# Altium PCB FTM_PCB.PcbDoc
Units mm, origin at the board's own origin, x right, y up, seen from the top; angles counter-clockwise.
Board outline 87.5 x 72.64 mm, 2 copper layers (Top Layer, Bottom Layer); 17 components, 20 nets, 84 pads, 10 vias.
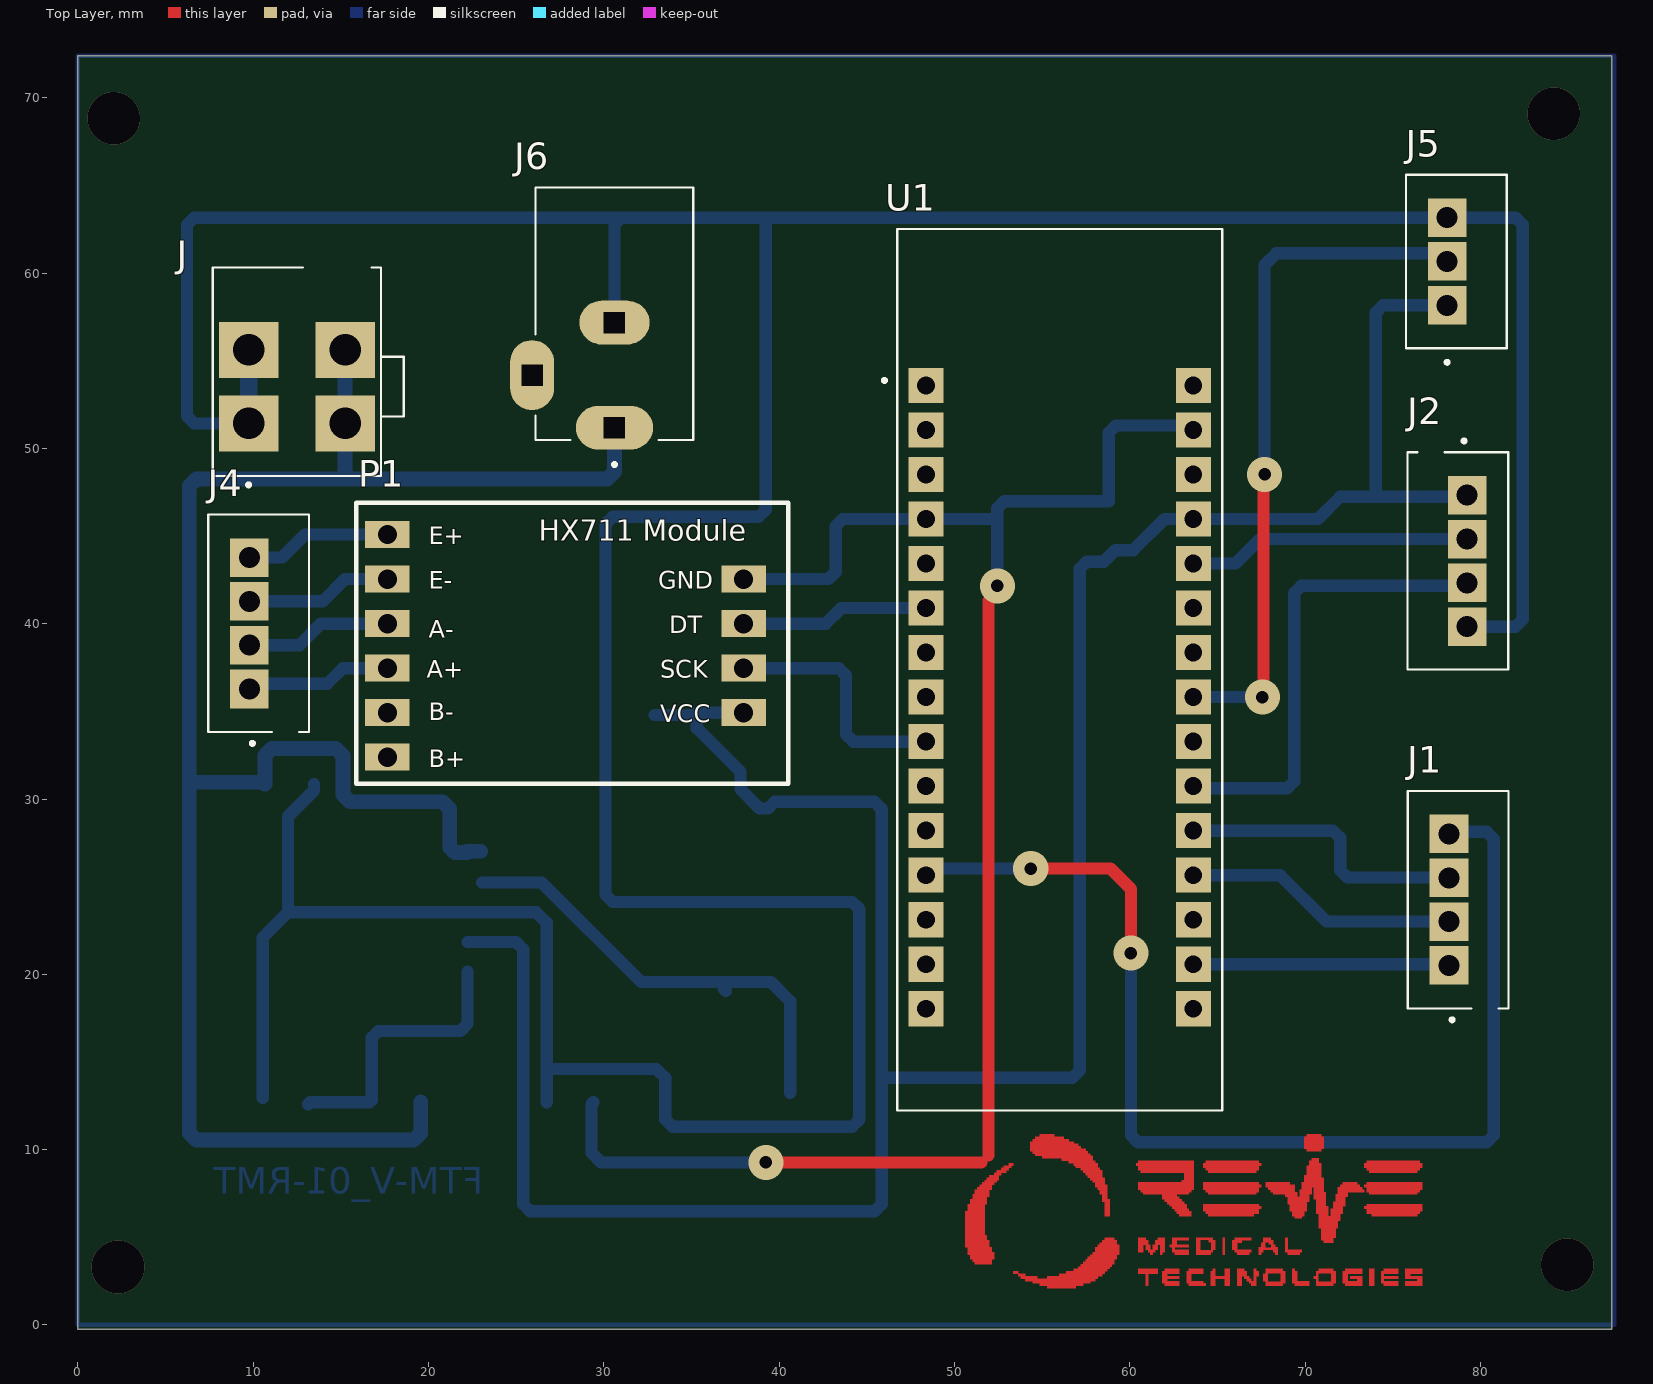
[diagram p0: Top Layer view]
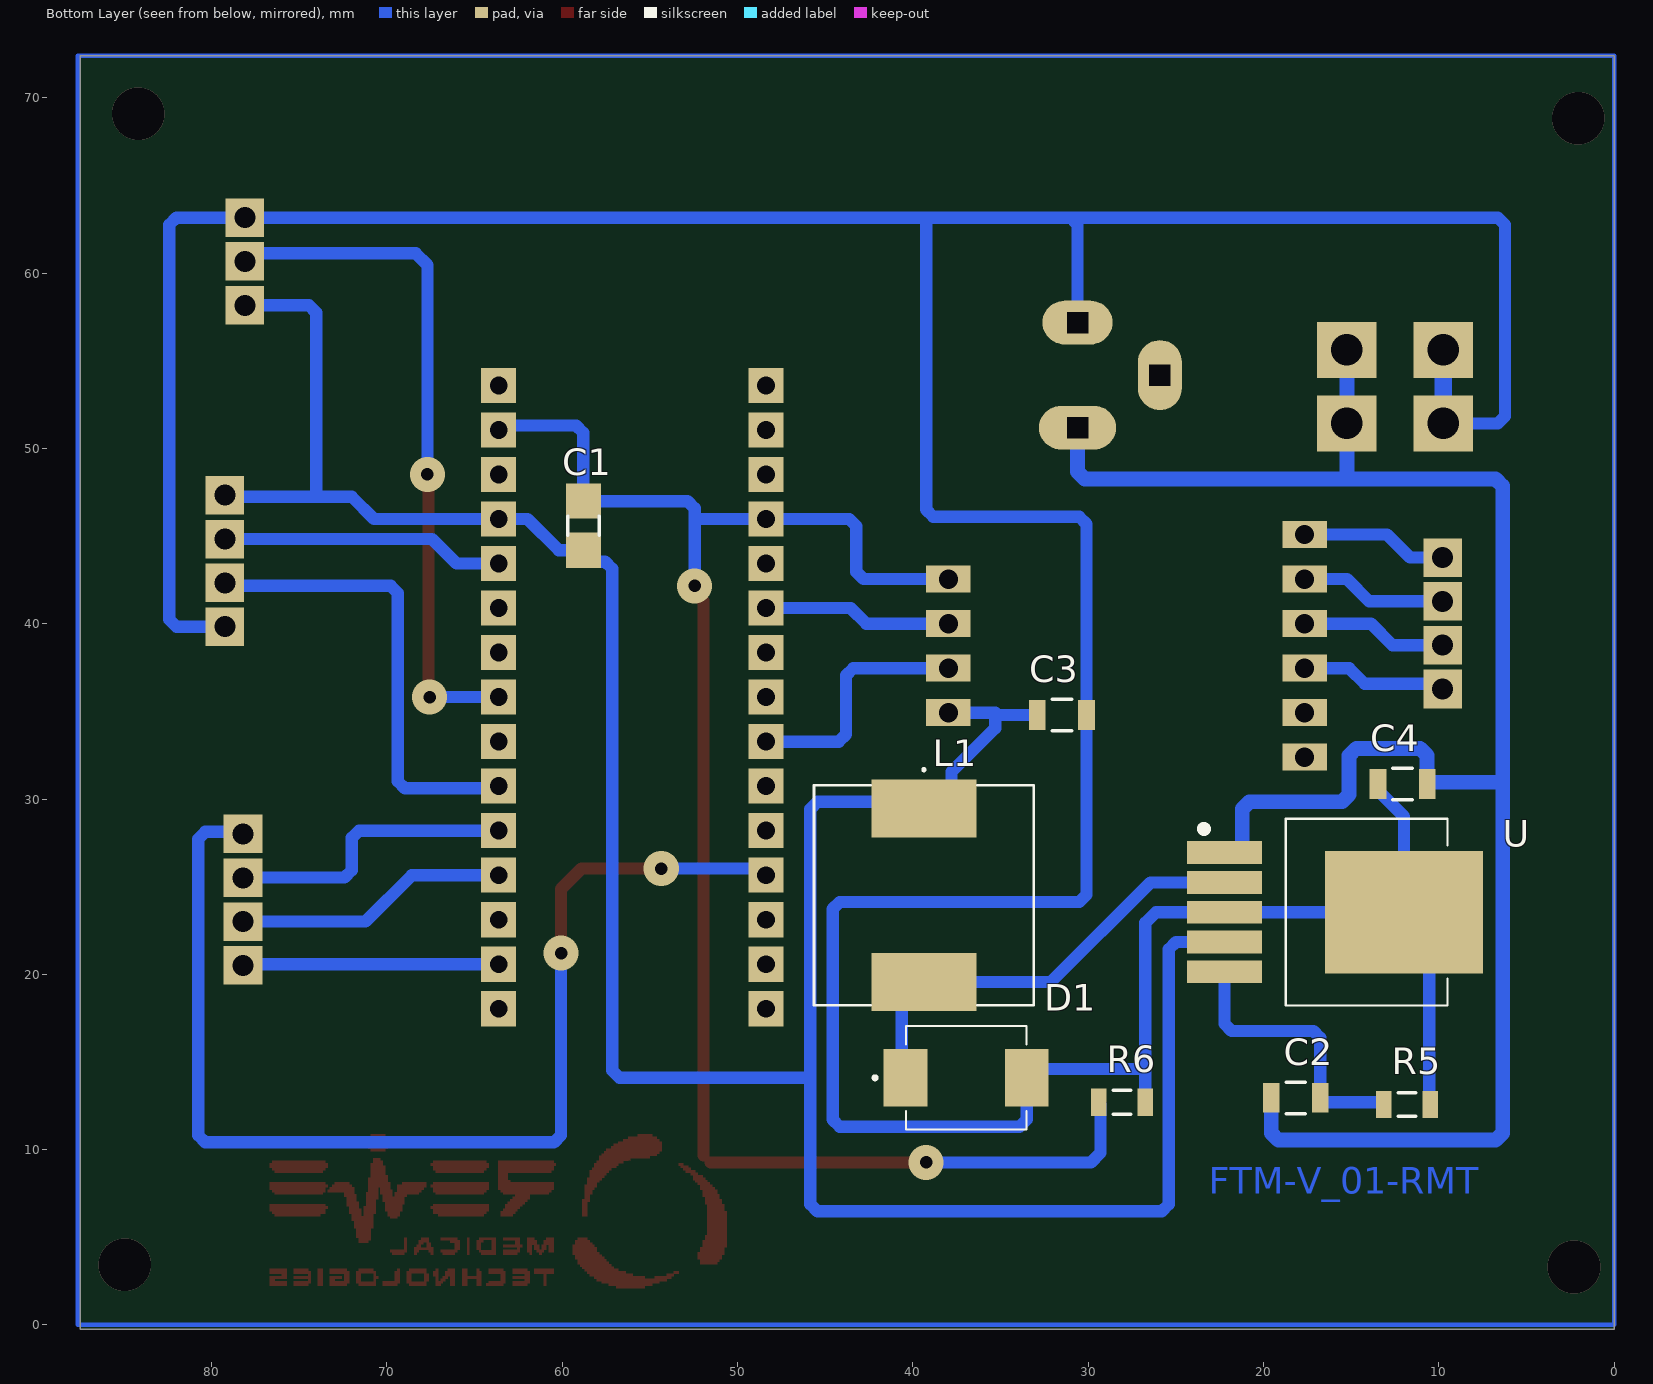
[diagram p1: Bottom Layer view, seen from below]
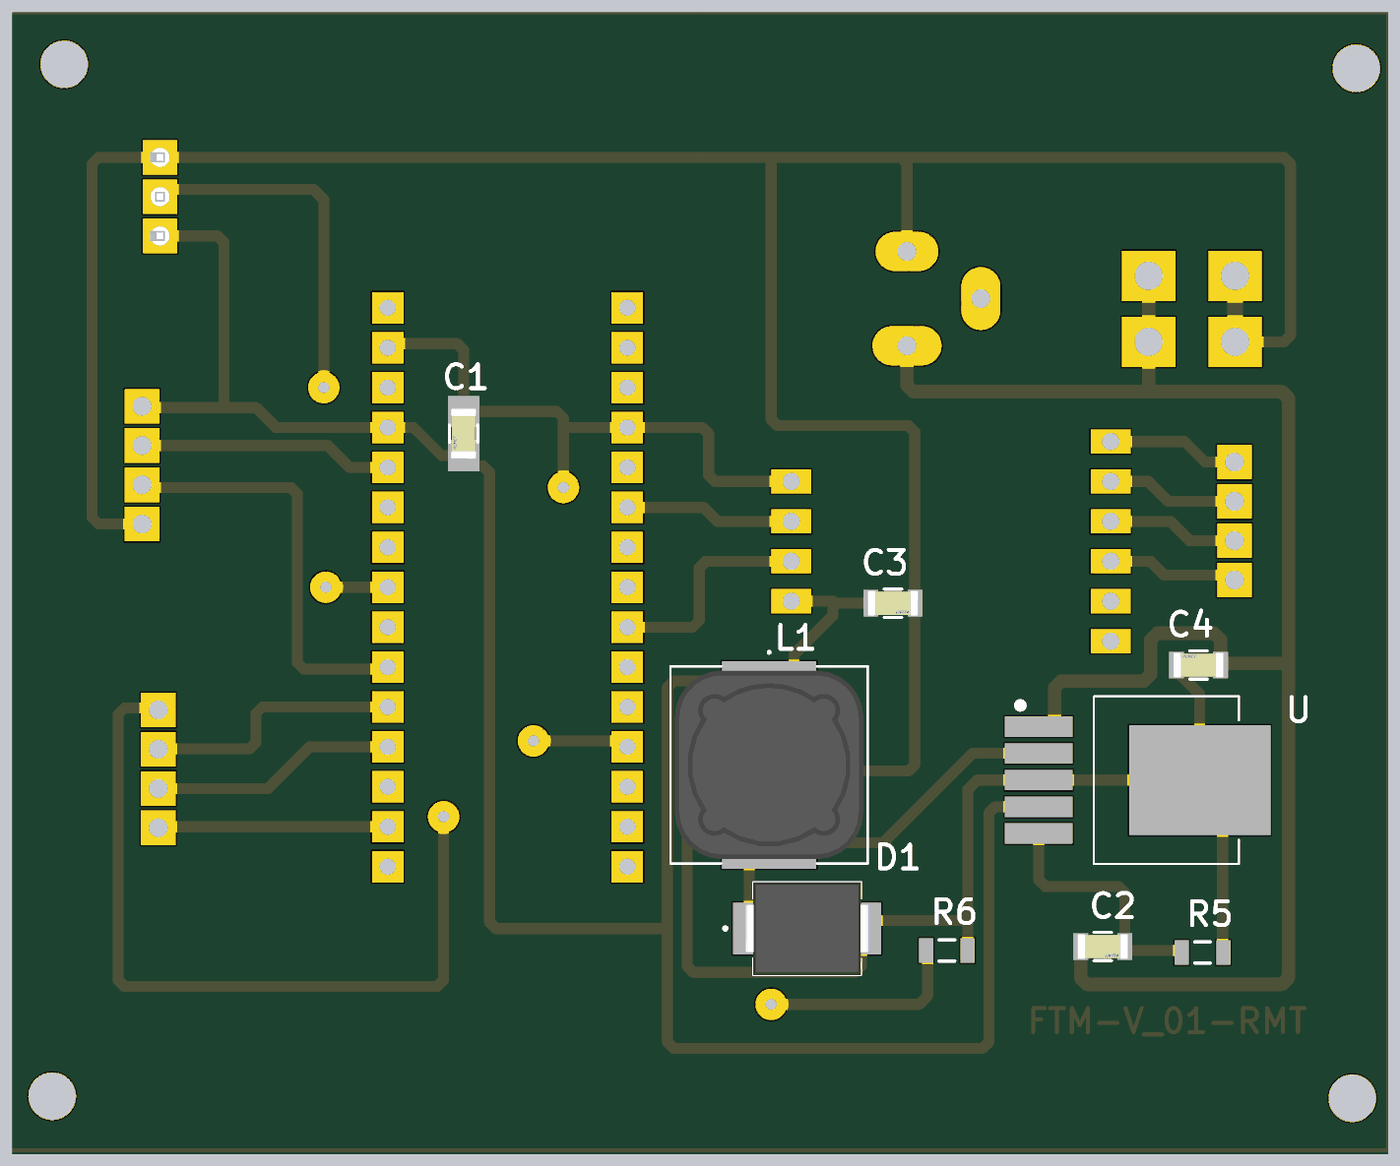
[diagram p2: 3D render of the assembled board from below, using the file's embedded part models]

## Layer stack, top to bottom
Top Solder: solder mask 0.0102, Solder Resist, Dk 3.5
Top Layer: signal copper 0.0356
Dielectric 1: dielectric 0.32, FR-4, Dk 4.8
Bottom Layer: signal copper 0.0356
Bottom Solder: solder mask 0.0102, Solder Resist, Dk 3.5

## Board outline
0,-0.254 0,72.39 87.503,72.39 87.503,-0.254

## Design rules (kind name [scope] priority, off if disabled: settings)
Clearance [All] p1: gap=0.254 ignorepadtopadclearanceinfootprint=FALSE except(0: Arc-Hole Track-Hole SMDPad-Hole THPad-Hole Via-Hole Fill-Hole Poly-Hole Region-Hole Text-Hole)
HoleSize [All] p1: absolutevalues=TRUE maxlimit=5.08 minlimit=0.025 maxpercent=80.000 minpercent=20.000
PolygonConnect [All] p1: connectstyle=Relief reliefconductorwidth=0.254 reliefentries=4 polygonreliefangle="90 Angle" airgapwidth=0.254
RoutingVias [All] p1: holewidth=1 width=1.27 viastyle="Through Hole" minholewidth=0.711 minwidth=1.27 maxholewidth=1 maxwidth=1.27
SolderMaskExpansion [All] p1: expansion=0.102 istentingtop=FALSE
Width [All] p1: maxlimit=1 minlimit=0.7 preferedwidth=1
29 further rules are at their usual default settings.

## Components (designator, comment, footprint, x,y, rotation, side; value= is the part's Value field where it differs from the comment)
C1 "C1206C101J1GACTU" FP-C1206C-EB-MFG#1 58.801,45.593 r90 bottom value="100 pF"
C2 "C1206C101J1GACTU" FP-C1206C-EB-MFG#2 18.158,12.954 r0 bottom value="100 pF"
C3 "C1206C101J1GACTU" FP-C1206C-EB-MFG#2 31.496,34.798 r0 bottom value="100 pF"
C4 "C1206C101J1GACTU" FP-C1206C-EB-MFG#2 12.065,30.861 r180 bottom value="100 pF"
D1 "SS34" DIOM7959X265N 36.957,14.097 r180 bottom
J "3-1775099-0" TE_3-1775099-0 12.49,53.526 r90 top
J1 "B4B-XH-AM_(LF)(SN)" JST_B4B-XH-AM_(LF)(SN) 78.74,24.257 r270 top
J2 "B4B-XH-AM_(LF)(SN)" JST_B4B-XH-AM_(LF)(SN) 78.723,43.581 r90 top
J4 "B4B-XH-AM_(LF)(SN)" JST_B4B-XH-AM_(LF)(SN) 10.304,40.025 r270 top
J5 "B3B-XH-A_(LF)(SN)" "JST_B3B-XH-A (LF)(SN)" 78.63,60.666 r270 top
J6 "DC-005-5A-2.0" XKB_DC-005-5A-2.0 30.607,57.181 r270 top
L1 "CDRH127/LDNP-470MC" IND_CDRH127/LDNP-470MC_SUM 39.37,24.511 r270 bottom value=100UH
P1 "Component_1" PCBComponent_1 9.779,46.736 r0 top
R5 "ERJ-8ENF1001V" RESC3216X70X50LL05T20 11.811,12.573 r0 bottom value=1kOhms
R6 "ERJ-8ENF1001V" RESC3216X70X50LL05T20 28.067,12.7 r180 bottom value=1kOhms
U "LM2576-5.0WU" DPAK6P170_1524X459L254X81N 15.895,23.544 r270 bottom
U1 "NUCLEO-L432KC" MODULE_NUCLEO-L432KC 56.007,37.379 r0 top

## Footprints (in the part's own frame and the unit in brackets; to place one, negate y for a bottom-side part, rotate by r counter-clockwise, add the part's x,y. Pads: shape width x height; smd on the part's side, far side on the other; paste and mask are expansions set on the pad)
DIOM7959X265N [mm]
  rect 2.5x3.3 smd: A(3.455,0) C(-3.455,0)
  silkscreen extent -5.3,-2.95 3.44,2.95, body extent -3.98,-2.95 3.98,2.95, height 2.65
DPAK6P170_1524X459L254X81N [mm]
  rect 1.3x4.3 smd: 1(-3.4,-6.33) 2(-1.7,-6.33) 3(0,-6.33) 4(1.7,-6.33) 5(3.4,-6.33)
  rect 7x9 smd: 6(0,3.91)
  silkscreen extent -5.33,-7.7 5.33,6.4
FP-C1206C-EB-MFG#1 [mm]
  rect 2x2 smd paste+0 mask+0: 1(-1.4,0) 2(1.4,0)
  silkscreen extent -0.55,-0.9 0.55,0.9, body extent -1.6,-0.8 1.6,0.8, height 0.88
FP-C1206C-EB-MFG#2 [mm]
  rect 0.95x1.7 smd paste+0 mask+0: 1(-1.4,0) 2(1.4,0)
  silkscreen extent -0.55,-0.9 0.55,0.9, body extent -1.6,-0.8 1.6,0.8, height 0.88
IND_CDRH127/LDNP-470MC_SUM [mm]
  rect 3.3x6 smd: 1(-4.953,0) 2(4.953,0)
  silkscreen extent -7.24,-6.27 6.27,6.27, body extent -6,-6 6,6, height 8
"JST_B3B-XH-A (LF)(SN)" [mm]
  rect 2.2x2.2 hole 1.2: 1(2.5,-0.525) 2(0,-0.525) 3(-2.5,-0.525)
  silkscreen extent -4.95,-2.88 5.85,2.88, body extent -4.95,-2.88 4.95,2.88, height 7
JST_B4B-XH-AM_(LF)(SN) [mm]
  rect 2.2x2.2 hole 1.2: 1(3.75,-0.525) 2(1.25,-0.525) 3(-1.25,-0.525) 4(-3.75,-0.525)
  silkscreen extent -6.2,-2.88 6.95,2.88
MODULE_NUCLEO-L432KC [mm]
  rect 2x2 hole 1.02: CN3_1(-7.62,16.215) CN3_2(-7.62,13.675) CN3_3(-7.62,11.135) CN3_4(-7.62,8.595) CN3_5(-7.62,6.055) CN3_6(-7.62,3.515) CN3_7(-7.62,0.975) CN3_8(-7.62,-1.565) CN3_9(-7.62,-4.105) CN3_10(-7.62,-6.645) CN3_11(-7.62,-9.185) CN3_12(-7.62,-11.725) CN3_13(-7.62,-14.265) CN3_14(-7.62,-16.805) CN3_15(-7.62,-19.345) CN4_1(7.62,16.215) CN4_2(7.62,13.675) CN4_3(7.62,11.135) CN4_4(7.62,8.595) CN4_5(7.62,6.055) CN4_6(7.62,3.515) CN4_7(7.62,0.975) CN4_8(7.62,-1.565) CN4_9(7.62,-4.105) CN4_10(7.62,-6.645) CN4_11(7.62,-9.185) CN4_12(7.62,-11.725) CN4_13(7.62,-14.265) CN4_14(7.62,-16.805) CN4_15(7.62,-19.345)
  silkscreen extent -10.1,-25.14 9.27,25.14
PCBComponent_1 [mil]
  rect 100x60.63 hole 43.31 paste+0 mask+4: 1(1110,-165) 2(1110,-265) 3(1110,-365) 4(1110,-465) 5(310,-565) 6(310,-465) 7(310,-365) 8(310,-265) 9(310,-165) 10(310,-65)
  silkscreen extent 240,-625 1210,7
RESC3216X70X50LL05T20 [mm] "Chip Resistor, 2-Leads, Body 3.20x1.60mm, IPC High Density"
  rect 0.9x1.55 smd: 1(-1.325,0) 2(1.325,0)
  silkscreen extent -0.5,-0.67 0.5,0.67, body extent -1.63,-0.82 1.62,0.82, height 0.7
TE_3-1775099-0 [mm]
  rect 3.2x3.4 hole 1.8: 1(-2.1,2.75) 2(-2.1,-2.75) 3(2.1,2.75) 4(2.1,-2.75)
  silkscreen extent -5.7,-6.1 6.8,4.8
XKB_DC-005-5A-2.0 [mm]
  oval 2.5x4.4 hole 1.2 square: 1(6,0)
  oval 2.5x4 hole 1.2 square: 2(0,0)
  oval 4x2.5 hole 1.2 square: 3(3,-4.7)
  silkscreen extent -7.7,-4.5 8.2,4.5

## Part data
C1: library part CMP-03020-011698-1, "CAP CER 100PF 100V C0G/NP0 1206", Capacitance="100 pF", Manufacturer=KEMET, Package=C1206C-EB, Temperature="-55°C to +150°C", Temperature Characteristic=C0G, Temperature Coefficient=15%, Temperature Range High=+150°C, Temperature Range Low=-55°C, Tolerance=0.05, Voltage Rating="100 V", Automotive=Yes, Automotive Grade="Grade 0", Category=Cap, ComponentLink2Description=Datasheet, ComponentLink2URL=https://content.kemet.com/datasheets/KEM_C1007_X8R_ULTRA_150C_SMD.pdf, Device Class L1="Passive Components", Device Class L2=Capacitors, Device Class L3="Ceramic Capacitors", Digikey Description="CAP CER 100PF 100V C0G/NP0 1206", Height=0.88mm, Ipc Land Pattern Name=CAPC320160X78, Lead Free=Yes, Manufacturer Part Number=C1206C101J1GACTU, Material=Ceramic, Mouser Description="Multilayer Ceramic Capacitors MLCC - SMD/SMT 100volts 100pF C0G 5%", Octopart=https://octopart.com/c1206c101j1gactu-kemet-98729, RoHS=TRUE
C2: library part CMP-03020-011698-1, "CAP CER 100PF 100V C0G/NP0 1206", Capacitance=100uF, Manufacturer=KEMET, Package=C1206C-EB, Temperature="-55°C to +150°C", Temperature Characteristic=C0G, Temperature Coefficient=15%, Temperature Range High=+150°C, Temperature Range Low=-55°C, Tolerance=0.05, Voltage Rating="100 V", Automotive=Yes, Automotive Grade="Grade 0", Category=Cap, ComponentLink2Description=Datasheet, ComponentLink2URL=https://content.kemet.com/datasheets/KEM_C1007_X8R_ULTRA_150C_SMD.pdf, Device Class L1="Passive Components", Device Class L2=Capacitors, Device Class L3="Ceramic Capacitors", Digikey Description="CAP CER 100PF 100V C0G/NP0 1206", Height=0.88mm, Ipc Land Pattern Name=CAPC320160X78, Lead Free=Yes, Manufacturer Part Number=C1206C101J1GACTU, Material=Ceramic, Mouser Description="Multilayer Ceramic Capacitors MLCC - SMD/SMT 100volts 100pF C0G 5%", Octopart=https://octopart.com/c1206c101j1gactu-kemet-98729, RoHS=TRUE
C3: library part CMP-03020-011698-1, "CAP CER 100PF 100V C0G/NP0 1206", Capacitance=1000uF, Manufacturer=KEMET, Package=C1206C-EB, Temperature="-55°C to +150°C", Temperature Characteristic=C0G, Temperature Coefficient=15%, Temperature Range High=+150°C, Temperature Range Low=-55°C, Tolerance=0.05, Voltage Rating="100 V", Automotive=Yes, Automotive Grade="Grade 0", Category=Cap, ComponentLink2Description=Datasheet, ComponentLink2URL=https://content.kemet.com/datasheets/KEM_C1007_X8R_ULTRA_150C_SMD.pdf, Device Class L1="Passive Components", Device Class L2=Capacitors, Device Class L3="Ceramic Capacitors", Digikey Description="CAP CER 100PF 100V C0G/NP0 1206", Height=0.88mm, Ipc Land Pattern Name=CAPC320160X78, Lead Free=Yes, Manufacturer Part Number=C1206C101J1GACTU, Material=Ceramic, Mouser Description="Multilayer Ceramic Capacitors MLCC - SMD/SMT 100volts 100pF C0G 5%", Octopart=https://octopart.com/c1206c101j1gactu-kemet-98729, RoHS=TRUE
C4: library part CMP-03020-011698-1, "CAP CER 100PF 100V C0G/NP0 1206", Capacitance="100 uF", Manufacturer=KEMET, Package=C1206C-EB, Temperature="-55°C to +150°C", Temperature Characteristic=C0G, Temperature Coefficient=15%, Temperature Range High=+150°C, Temperature Range Low=-55°C, Tolerance=0.05, Voltage Rating="100 V", Automotive=Yes, Automotive Grade="Grade 0", Category=Cap, ComponentLink2Description=Datasheet, ComponentLink2URL=https://content.kemet.com/datasheets/KEM_C1007_X8R_ULTRA_150C_SMD.pdf, Device Class L1="Passive Components", Device Class L2=Capacitors, Device Class L3="Ceramic Capacitors", Digikey Description="CAP CER 100PF 100V C0G/NP0 1206", Height=0.88mm, Ipc Land Pattern Name=CAPC320160X78, Lead Free=Yes, Manufacturer Part Number=C1206C101J1GACTU, Material=Ceramic, Mouser Description="Multilayer Ceramic Capacitors MLCC - SMD/SMT 100volts 100pF C0G 5%", Octopart=https://octopart.com/c1206c101j1gactu-kemet-98729, RoHS=TRUE
D1: "Diode Schottky 40 V 3A Surface Mount SMC (DO-214AB)", Package="SMC-2 ON Semiconductor", Check_prices=https://www.snapeda.com/parts/SS34/Onsemi/view-part/?ref=eda, MF=onsemi, MP=SS34, SnapEDA_Link=https://www.snapeda.com/parts/SS34/Onsemi/view-part/?ref=snap
J: "Conn Power PL 4 POS 4.2mm Solder ST Thru-Hole 4 Terminal 1 Port Tray", Package=None, Availability=Unavailable, MF="TE Connectivity", MP=3-1775099-0, price=None, SnapEDA_Link=https://www.snapeda.com/parts/3-1775099-0/TE%20Connectivity%20AMP%20Connectors/view-part/857303/?ref=snap
J1 J2 J4: "Conn Shrouded Header HDR 4 POS 2.5mm Solder ST Top Entry Thru-Hole Box", Package=None, Availability="In Stock", Check_prices=https://www.snapeda.com/parts/B4B-XH-AM%20(LF)(SN)/JST/view-part/?ref=eda, MF="JST Corporation", MP="B4B-XH-AM (LF)(SN)", price=None, Purchase-URL="https://pricing.snapeda.com/search?q=B4B-XH-AM (LF)(SN)&ref=eda", SnapEDA_Link=https://www.snapeda.com/parts/B4B-XH-AM%20(LF)(SN)/JST/view-part/?ref=snap
J5: "Connector Header Through Hole 3 position 0.098 (2.50mm)", Package=None, Check_prices=https://www.snapeda.com/parts/B3B-XH-A%20(LF)(SN)/JST+Sales+America+Inc./view-part/?ref=eda, MF="JST Sales America Inc.", MP="B3B-XH-A (LF)(SN)", SnapEDA_Link=https://www.snapeda.com/parts/B3B-XH-A%20(LF)(SN)/JST+Sales+America+Inc./view-part/?ref=snap
J6: "DC Power Receptacle Jack, Through Holeï¼ŒRight Angle", Package=Package, Check_prices=https://www.snapeda.com/parts/DC-005-5A-2.0/XKB+Industrial+Precision/view-part/?ref=eda, MF="XKB Industrial Precision", MP=DC-005-5A-2.0, SnapEDA_Link=https://www.snapeda.com/parts/DC-005-5A-2.0/XKB+Industrial+Precision/view-part/?ref=snap
L1: "47 ÂµH Shielded - Inductor 3.25 A 78mOhm Max Nonstandard", Package="Nonstandard Sumida", Availability="In Stock", Check_prices=https://www.snapeda.com/parts/CDRH127/LDNP-470MC/Sumida+America+Components+Inc./view-part/?ref=eda, MF="Sumida America", MP=CDRH127/LDNP-470MC, price=None, Purchase-URL=https://pricing.snapeda.com/search/part/CDRH127/LDNP-470MC/?ref=eda, SnapEDA_Link=https://www.snapeda.com/parts/CDRH127/LDNP-470MC/Sumida+America+Components+Inc./view-part/?ref=snap
R5 R6: library part CMP-2003-00017-1, Manufacturer=Panasonic, Part Number=ERJ-8ENF1001V
U: "Buck Switching Regulator IC Positive Fixed 5V 1 Output 3A TO-263-6, DÂ²Pak _5 Leads + Tab_, TO-263BA", Package="TO-263-5 Micrel", Availability=Unavailable, MF=Microchip, MP=LM2576-5.0WU, price=None, SnapEDA_Link=https://www.snapeda.com/parts/LM2576-5.0WU/Microchip/view-part/104848/?ref=snap
U1: "STM32 Nucleo-32 development board with STM32L432KC MCU, supports Arduino connectivity", Package=None, Availability=Unavailable, MP=NUCLEO-L432KC, price=None

## Via types
v1: diameter 2, hole 0.711, Top Layer to Bottom Layer, 6 vias
v2: diameter 3, hole 3, Top Layer to Bottom Layer, 4 vias

## Nets (pads, with @x,y where several pads share a name; then routed paths per layer and width w, separated by ;. In a path a pad name is that pad's centre, name@x,y a point inside that pad or via, vN(x,y) a via of type N, cw(c..) or ccw(c..) an arc to the next point about the centre after c; other vN are vias at no path point)
+3V3: J1.1 U1.CN4_14 | length 14.6
  Bottom Layer w0.7: U1.CN4_14 J1.1@78.215,20.574
+5V: C1.1 C3.2 J2.1 J5.1 L1.1 P1.4 U1.CN4_4 U.4 | length 159.1
  Bottom Layer w0.7: U.4 24.99,21.844 25.4,21.434 25.4,6.887 25.81,6.477 45.437,6.477 45.847,6.887 45.847,14.097 ; C3.2 35.306,34.798 35.306,34.036 37.79,31.552 37.79,30.562 38.888,29.464 L1.1 39.751,29.845 45.437,29.845 45.847,29.435 45.847,14.097 ; 35.306,34.925 P1.4 ; J5.1 74.451,58.166 74.041,57.756 74.041,47.244 ; J2.1 79.161,47.244 74.041,47.244 ; 45.847,14.097 56.74,14.097 57.15,14.507 57.15,43.133 57.56,43.543 58.526,43.543 59.181,44.198 60.206,44.198 61.982,45.974 U1.CN4_4 70.739,45.974 72.009,47.244 74.041,47.244
+12V: C2.2 C4.2 J6.1 J.2 J.4 U.1 | length 110.2
  Bottom Layer w0.85: C4.2 C4.2@10.665,30.959 ; J.4 J.2 15.24,48.26 ; C2.2@19.558,12.723 19.558,10.951 19.148,10.541 6.76,10.541 6.35,10.951 6.35,30.959 ; U.1 21.509,26.944 21.209,27.244 21.209,29.435 20.799,29.845 15.523,29.845 15.113,30.255 15.113,32.483 14.703,32.893 11.075,32.893 10.665,32.483 C4.2@10.665,30.959 ; U.1@22.225,27.022 U.1@22.967,27.022 ; J6.1 30.607,48.67 30.197,48.26 15.24,48.26 ; 6.35,30.959 C4.2@10.665,30.959 ; 6.35,30.959 6.35,47.85 6.76,48.26 15.24,48.26
A+: J4.1 P1.7 | length 8.4
  Bottom Layer w0.7: J4.1 10.08,36.576 14.224,36.576 15.113,37.465 P1.7
A-: J4.2 P1.8 | length 8.4
  Bottom Layer w0.7: J4.2 12.641,38.775 13.871,40.005 P1.8
AGND: C1.2 P1.1 R6.1 U1.CN3_4 U1.CN4_2 | length 95.5
  Top Layer w0.7: v1(39.243,9.271) 51.533,9.271 ; 51.943,9.681 51.943,41.304 52.451,41.812 v1(52.451,42.164)
  Bottom Layer w0.7: R6.1 29.292,12.6 29.292,9.824 29.845,9.271 v1(39.243,9.271) ; P1.1 42.813,42.545 43.223,42.955 43.223,45.564 43.633,45.974 U1.CN3_4 52.451,45.974 ; v1(52.451,42.164) 52.451,45.974 ; U1.CN4_2 63.373,51.308 59.211,51.308 58.801,50.898 C1.2 52.861,46.993 52.451,46.583 52.451,45.974
DIRECTION: J1.2 U1.CN4_12 | length 15.7
  Bottom Layer w0.7: U1.CN4_12 68.58,25.654 71.227,23.007 J1.2@78.235,23.007
DT: P1.2 U1.CN3_6 | length 10.8
  Bottom Layer w0.7: P1.2 42.661,40.005 43.55,40.894 U1.CN3_6
E+: J4.4 P1.10 | length 8.4
  Bottom Layer w0.7: J4.4 11.644,43.775 12.954,45.085 P1.10
E-: J4.3 P1.9 | length 8.4
  Bottom Layer w0.7: J4.3 13.97,41.275 15.24,42.545 P1.9
ENABLE: J1.3 U1.CN4_11 | length 16.8
  Bottom Layer w0.7: U1.CN4_11 71.599,28.194 72.009,27.784 72.009,25.937 72.419,25.527 J1.3@78.215,25.527
GND: C3.1 C4.1 D1.A J2.4 J5.3 J6.2 J.1 J.3 R5.1 R6.2 U.3 U.6 | length 266.6
  Bottom Layer w0.7: J.1 6.633,51.426 6.223,51.836 6.223,62.756 6.633,63.166 30.607,63.166 31.322,63.166 39.243,63.166 ; R5.1@10.542,12.954 10.542,22.101 U.6 ; C4.1 13.465,30.486 11.985,29.006 U.6 ; R6.2 26.742,14.605 ; J6.2 30.607,62.756 30.812,62.961 ; J2.4@78.949,39.751 79.029,39.831 J2.4 82.013,39.831 82.423,40.241 82.423,62.756 82.013,63.166 J5.3 45.038,63.166 39.243,63.166 ; U.6 U.3 26.133,23.544 26.742,22.935 26.742,14.605 ; 26.742,14.605 32.994,14.605 D1.A 33.502,11.713 33.912,11.303 44.167,11.303 44.577,11.713 44.577,23.72 44.167,24.13 30.509,24.13 30.099,24.54 30.099,34.798 30.099,45.691 30.509,46.101 38.833,46.101 39.243,46.511 39.243,63.166
  Bottom Layer w1: J.1 J.3
GPIO_OUTPUT: U1.CN4_15
NetC2_1: C2.1 R5.2 U.5 | length 16.1
  Bottom Layer w0.7: R5.2 13.136,12.598 13.236,12.698 16.633,12.698 16.758,12.823 16.758,16.38 17.145,16.767 21.815,16.767 22.225,17.177 U.5
NetD1_C: D1.C L1.2 U.2 | length 25.6
  Bottom Layer w0.7: U.2@23.045,25.244 26.445,25.244 32.131,19.558 L1.2 ; L1.2@36.83,19.177 L1.2@36.957,19.05 ; L1.2@39.53,19.558 40.627,18.46 D1.C@40.627,13.247
SCK: P1.3 U1.CN3_9 | length 14.1
  Bottom Layer w0.7: P1.3 43.405,37.465 43.815,37.055 43.815,33.684 44.225,33.274 U1.CN3_9
SERVO: J5.2 U1.CN4_8 | length 39.3
  Top Layer w0.7: v1(67.564,35.814) 67.627,35.877 67.627,48.45 v1(67.691,48.514)
  Bottom Layer w0.7: U1.CN4_8 v1(67.564,35.814) ; v1(67.691,48.514) 67.691,60.463 68.355,61.127 J5.2@78.105,61.127
STEPPER_PULSE: J1.4 U1.CN3_12 | length 67.1
  Top Layer w0.7: v1(54.356,26.035) 58.899,26.035 60.071,24.863 v1(60.071,21.209)
  Bottom Layer w0.7: U1.CN3_12 48.612,25.654 48.993,26.035 v1(54.356,26.035) ; v1(60.071,21.209) 60.071,10.824 60.481,10.414 80.362,10.414 80.772,10.824 80.772,27.724 80.362,28.134 78.342,28.134 J1.4
UART_RX: J2.2 U1.CN4_5 | length 16.2
  Bottom Layer w0.7: U1.CN4_5 66.04,43.434 67.437,44.831 J2.2
UART_TX: J2.3 U1.CN4_10 | length 26.8
  Bottom Layer w0.7: U1.CN4_10 63.754,30.607 68.972,30.607 69.382,31.017 69.382,41.754 69.792,42.164 78.51,42.164 78.522,42.176 79.093,42.176 J2.3
pads on no net: J6.3 P1.5 P1.6 U1.CN3_1 U1.CN3_2 U1.CN3_3 U1.CN3_5 U1.CN3_7 U1.CN3_8 U1.CN3_10 U1.CN3_11 U1.CN3_13 U1.CN3_14 U1.CN3_15 U1.CN4_1 U1.CN4_3 U1.CN4_6 U1.CN4_7 U1.CN4_9 U1.CN4_13
copper on no net: | length 320
  Bottom Layer w0.254: 0,0 87.63,0 87.63,72.39 0,72.39 0,0
  other v2: 2.286,3.302 84.963,3.429 2.032,68.834 84.201,69.088

## Other copper
Top Layer:
  region: 56.246,9.362 56.109,9.362 56.109,9.5 55.011,9.5 55.011,9.637 54.6,9.637 54.6,9.774 54.463,9.774 54.463,9.911 54.326,9.911 54.326,10.46 54.463,10.46 54.463,10.597 54.6,10.597 54.6,10.734 54.874,10.734 54.874,10.871 55.697,10.871 55.697,10.734 56.246,10.734 56.246,10.597 56.52,10.597 56.52,10.46 56.794,10.46 56.794,10.323 57.069,10.323 57.069,10.185 57.206,10.185 57.206,10.048 57.48,10.048 57.48,9.911 57.617,9.911 57.617,9.774 57.755,9.774 57.755,9.637 57.892,9.637 57.892,9.362 58.029,9.362 58.029,9.225 58.166,9.225 58.166,8.951 58.303,8.951 58.303,8.814 58.44,8.814 58.44,8.402 58.577,8.402 58.577,7.991 58.715,7.991 58.715,7.168 58.852,7.168 58.852,6.208 58.577,6.208 58.577,7.031 58.44,7.031 58.44,7.442 58.303,7.442 58.303,7.717 58.166,7.717 58.166,7.854 58.029,7.854 58.029,8.128 57.892,8.128 57.892,8.265 57.755,8.265 57.755,8.402 57.617,8.402 57.617,8.539 57.48,8.539 57.48,8.677 57.343,8.677 57.343,8.814 57.206,8.814 57.206,8.951 56.932,8.951 56.932,9.088 56.794,9.088 56.794,9.225 56.52,9.225 56.52,9.362 56.383,9.362
  region: 54.463,2.504 54.051,2.504 54.051,2.642 53.777,2.642 53.777,2.779 53.64,2.779 53.64,2.916 54.051,2.916 54.051,2.779 54.737,2.779 54.737,2.642 55.286,2.642 55.286,2.779 55.971,2.779 55.971,2.916 56.383,2.916 56.383,3.053 56.794,3.053 56.794,3.19 57.069,3.19 57.069,3.327 57.206,3.327 57.206,3.465 57.343,3.465 57.343,3.602 57.48,3.602 57.48,3.739 57.617,3.739 57.617,3.876 57.755,3.876 57.755,4.013 57.892,4.013 57.892,4.15 58.029,4.15 58.029,4.425 58.166,4.425 58.166,4.562 58.303,4.562 58.303,4.699 58.44,4.699 58.44,4.836 58.577,4.836 58.577,4.973 59.126,4.973 59.126,4.836 59.263,4.836 59.263,4.562 59.4,4.562 59.4,4.013 59.263,4.013 59.263,3.739 59.126,3.739 59.126,3.465 58.989,3.465 58.989,3.327 58.852,3.327 58.852,3.19 58.715,3.19 58.715,3.053 58.577,3.053 58.577,2.916 58.44,2.916 58.44,2.779 58.166,2.779 58.166,2.642 58.029,2.642 58.029,2.504 57.755,2.504 57.755,2.367 57.343,2.367 57.343,2.23 56.932,2.23 56.932,2.093 55.286,2.093 55.286,2.23 54.874,2.23 54.874,2.367 54.463,2.367
  region: 50.622,5.11 50.622,6.482 50.759,6.482 50.759,6.894 50.897,6.894 50.897,7.168 51.034,7.168 51.034,7.442 51.171,7.442 51.171,7.717 51.308,7.717 51.308,7.854 51.445,7.854 51.445,7.991 51.582,7.991 51.582,8.128 51.719,8.128 51.719,8.265 51.857,8.265 51.857,8.402 51.994,8.402 51.994,8.539 52.268,8.539 52.268,8.677 52.405,8.677 52.405,8.814 52.68,8.814 52.68,8.951 52.817,8.951 52.817,9.088 53.091,9.088 53.091,9.225 53.365,9.225 53.365,9.088 53.228,9.088 53.228,8.951 53.091,8.951 53.091,8.814 52.954,8.814 52.954,8.677 52.68,8.677 52.68,8.539 52.542,8.539 52.542,8.265 52.405,8.265 52.405,8.128 52.268,8.128 52.268,7.991 52.131,7.991 52.131,7.717 51.994,7.717 51.994,7.305 51.857,7.305 51.857,6.894 51.719,6.894 51.719,5.11 51.857,5.11 51.857,4.836 51.994,4.836 51.994,4.425 52.131,4.425 52.131,4.15 52.268,4.15 52.268,3.739 52.131,3.739 52.131,3.465 51.171,3.465 51.171,3.602 51.034,3.602 51.034,3.739 50.897,3.739 50.897,4.013 50.759,4.013 50.759,4.425 50.622,4.425 50.622,4.973
  region: 63.927,2.504 64.201,2.504 64.201,2.367 64.338,2.367 64.338,2.23 63.378,2.23 63.378,2.367 63.241,2.367 63.241,3.053 63.378,3.053 63.378,3.19 64.201,3.19 64.201,2.916 63.515,2.916 63.515,2.504 63.79,2.504
  region: 67.081,2.642 67.081,3.19 67.219,3.19 67.219,3.053 67.356,3.053 67.356,2.779 67.219,2.779 67.219,2.23 66.944,2.23 66.944,2.367 66.807,2.367 66.807,2.504 66.67,2.504 66.67,2.642 66.533,2.642 66.533,2.779 66.396,2.779 66.396,2.23 66.121,2.23 66.121,3.19 66.533,3.19 66.533,3.053 66.67,3.053 66.67,2.779 66.807,2.779 66.807,2.642 66.944,2.642 66.944,2.504 67.081,2.504
  region: 61.046,2.23 60.909,2.23 60.909,2.916 60.498,2.916 60.498,3.19 61.595,3.19 61.595,2.916 61.046,2.916 61.046,2.367
  region: 65.435,3.053 65.435,3.19 65.71,3.19 65.71,2.23 65.435,2.23 65.435,2.642 64.887,2.642 64.887,2.23 64.613,2.23 64.613,3.053 64.75,3.053 64.75,3.19 64.887,3.19 64.887,2.779 65.435,2.779 65.435,2.916
  region: 62.829,3.053 62.829,2.916 62.144,2.916 62.144,2.779 62.829,2.779 62.829,2.642 62.144,2.642 62.144,2.504 62.829,2.504 62.829,2.23 62.006,2.23 62.006,2.367 61.869,2.367 61.869,3.053 62.006,3.053 62.006,3.19 62.829,3.19
  region: 53.64,3.053 53.64,2.916 53.365,2.916 53.365,3.053 53.503,3.053
  region: 74.625,6.894 76.683,6.894 76.683,6.482 76.545,6.482 76.545,6.345 76.408,6.345 76.408,6.208 73.802,6.208 73.802,6.345 73.528,6.345 73.528,6.619 73.391,6.619 73.391,6.756 73.528,6.756 73.528,6.894 74.488,6.894
  region: 64.475,6.208 64.475,6.345 64.338,6.345 64.338,6.482 64.201,6.482 64.201,6.894 67.356,6.894 67.356,6.756 67.493,6.756 67.493,6.619 67.356,6.619 67.356,6.345 67.081,6.345 67.081,6.208 64.613,6.208
  region: 64.75,9.362 67.356,9.362 67.356,9.225 67.493,9.225 67.493,9.088 67.356,9.088 67.356,8.814 67.219,8.814 67.219,8.677 64.475,8.677 64.475,8.814 64.338,8.814 64.338,8.951 64.201,8.951 64.201,9.225 64.338,9.225 64.338,9.362 64.613,9.362
  region: 73.665,8.677 73.665,8.814 73.528,8.814 73.528,8.951 73.391,8.951 73.391,9.225 73.528,9.225 73.528,9.362 76.545,9.362 76.545,9.225 76.683,9.225 76.683,8.951 76.545,8.951 76.545,8.814 76.408,8.814 76.408,8.677 73.802,8.677
  region: 69.687,7.305 69.687,7.717 69.825,7.717 69.825,8.128 69.962,8.128 69.962,8.539 70.099,8.539 70.099,9.088 70.236,9.088 70.236,9.362 70.373,9.362 70.373,9.5 70.785,9.5 70.785,9.225 70.922,9.225 70.922,8.402 71.059,8.402 71.059,7.579 71.196,7.579 71.196,6.756 71.333,6.756 71.333,6.208 71.471,6.208 71.471,6.619 71.608,6.619 71.608,7.031 71.745,7.031 71.745,7.442 71.882,7.442 71.882,7.854 72.019,7.854 72.019,7.991 72.156,7.991 72.156,8.128 72.979,8.128 72.979,7.991 73.116,7.991 73.116,7.854 73.254,7.854 73.254,7.717 73.391,7.717 73.391,7.579 72.431,7.579 72.431,7.305 72.293,7.305 72.293,6.756 72.156,6.756 72.156,6.345 72.019,6.345 72.019,5.933 71.882,5.933 71.882,5.522 71.745,5.522 71.745,4.973 71.608,4.973 71.608,4.699 71.059,4.699 71.059,4.836 70.922,4.836 70.922,5.522 70.785,5.522 70.785,6.345 70.648,6.345 70.648,7.168 70.51,7.168 70.51,7.854 70.373,7.854 70.373,7.442 70.236,7.442 70.236,7.031 70.099,7.031 70.099,6.482 69.962,6.482 69.962,6.208 69.825,6.208 69.825,6.071 69.413,6.071 69.413,6.208 69.276,6.208 69.276,6.482 69.139,6.482 69.139,6.894 69.002,6.894 69.002,7.305 68.864,7.305 68.864,7.442 68.179,7.442 68.179,7.579 68.042,7.579 68.042,7.717 67.904,7.717 67.904,7.854 67.767,7.854 67.767,8.128 69.139,8.128 69.139,7.991 69.413,7.991 69.413,7.579 69.55,7.579 69.55,7.305
  region: 66.533,7.442 64.475,7.442 64.475,7.579 64.338,7.579 64.338,7.717 64.201,7.717 64.201,8.128 67.356,8.128 67.356,7.991 67.493,7.991 67.493,7.854 67.356,7.854 67.356,7.579 67.219,7.579 67.219,7.442 66.67,7.442
  region: 62.829,8.128 62.967,8.128 62.967,8.265 63.104,8.265 63.104,8.677 60.635,8.677 60.635,8.814 60.498,8.814 60.498,9.088 60.361,9.088 60.361,9.225 60.498,9.225 60.498,9.362 63.652,9.362 63.652,7.717 63.515,7.717 63.515,7.579 63.378,7.579 63.378,7.442 62.692,7.442 62.692,7.305 62.829,7.305 62.829,7.168 62.967,7.168 62.967,7.031 63.104,7.031 63.104,6.894 63.241,6.894 63.241,6.619 63.378,6.619 63.378,6.482 63.515,6.482 63.515,6.208 62.829,6.208 62.829,6.345 62.692,6.345 62.692,6.482 62.555,6.482 62.555,6.619 62.418,6.619 62.418,6.756 62.281,6.756 62.281,6.894 62.144,6.894 62.144,7.031 62.006,7.031 62.006,7.168 61.869,7.168 61.869,7.442 60.772,7.442 60.772,7.579 60.635,7.579 60.635,7.717 60.498,7.717 60.498,8.128 62.692,8.128
  region: 70.51,10.871 70.922,10.871 70.922,10.734 71.059,10.734 71.059,10.048 70.922,10.048 70.922,9.911 70.099,9.911 70.099,10.048 69.962,10.048 69.962,10.734 70.099,10.734 70.099,10.871 70.373,10.871
  region: 74.214,7.442 73.665,7.442 73.665,7.579 73.528,7.579 73.528,7.854 73.391,7.854 73.391,7.991 73.528,7.991 73.528,8.128 76.683,8.128 76.683,7.717 76.545,7.717 76.545,7.579 76.408,7.579 76.408,7.442 74.351,7.442
  region: 63.104,4.288 63.378,4.288 63.378,4.013 62.555,4.013 62.555,4.15 62.418,4.15 62.418,4.425 62.281,4.425 62.281,4.562 62.418,4.562 62.418,4.973 63.378,4.973 63.378,4.836 62.692,4.836 62.692,4.562 63.378,4.562 63.378,4.425 62.555,4.425 62.555,4.288 62.967,4.288
  region: 65.298,4.15 65.298,4.973 65.435,4.973 65.435,4.013 65.298,4.013
  region: 72.568,2.642 72.568,2.779 73.254,2.779 73.254,2.23 72.293,2.23 72.293,2.367 72.156,2.367 72.156,3.053 72.293,3.053 72.293,3.19 73.254,3.19 73.254,2.916 72.431,2.916 72.431,2.504 72.979,2.504 72.979,2.642 72.705,2.642
  region: 75.311,2.642 74.488,2.642 74.488,2.504 75.311,2.504 75.311,2.23 74.488,2.23 74.488,2.367 74.351,2.367 74.351,3.053 74.488,3.053 74.488,3.19 75.311,3.19 75.311,2.916 74.488,2.916 74.488,2.779 75.311,2.779
  region: 66.67,4.288 66.944,4.288 66.944,4.15 66.807,4.15 66.807,4.013 66.121,4.013 66.121,4.15 65.984,4.15 65.984,4.288 65.847,4.288 65.847,4.836 65.984,4.836 65.984,4.973 66.944,4.973 66.944,4.836 66.396,4.836 66.396,4.699 66.121,4.699 66.121,4.288 66.533,4.288
  region: 68.727,3.053 68.864,3.053 68.864,2.367 68.727,2.367 68.727,2.23 67.767,2.23 67.767,2.367 67.767,2.504 67.63,2.504 67.63,2.916 67.767,2.916 67.767,3.19 68.727,3.19 hole: 68.59,2.916 67.904,2.916 67.904,2.504 68.59,2.504
  region: 60.772,4.973 60.909,4.973 60.909,4.836 61.046,4.836 61.046,4.562 61.184,4.562 61.184,4.288 61.321,4.288 61.321,4.562 61.458,4.562 61.458,4.836 61.595,4.836 61.595,4.973 62.006,4.973 62.006,4.15 61.869,4.15 61.869,4.013 61.732,4.013 61.732,4.562 61.595,4.562 61.595,4.288 61.458,4.288 61.458,4.15 61.321,4.15 61.321,4.013 61.184,4.013 61.184,4.15 61.046,4.15 61.046,4.288 60.909,4.288 60.909,4.562 60.772,4.562 60.772,4.15 60.498,4.15 60.498,4.973 60.635,4.973
  region: 68.042,4.836 68.179,4.836 68.179,4.562 68.316,4.562 68.316,4.425 68.453,4.425 68.453,4.013 68.316,4.013 68.316,4.15 68.179,4.15 68.179,4.288 67.63,4.288 67.63,4.15 67.493,4.15 67.493,4.013 67.356,4.013 67.356,4.425 67.493,4.425 67.493,4.699 67.63,4.699 67.63,4.973 68.042,4.973 hole: 67.904,4.699 67.767,4.699 67.767,4.425 68.042,4.425 68.042,4.562 67.904,4.562
  region: 64.75,4.836 64.887,4.836 64.887,4.288 64.75,4.288 64.75,4.15 64.613,4.15 64.613,4.013 63.79,4.013 63.79,4.973 64.75,4.973 hole: 64.475,4.836 64.064,4.836 64.064,4.288 64.613,4.288 64.613,4.562 64.613,4.699 64.475,4.699
  region: 69.002,4.836 69.002,4.288 69.825,4.288 69.825,4.15 69.687,4.15 69.687,4.013 69.002,4.013 69.002,4.15 68.864,4.15 68.864,4.973 69.002,4.973
  region: 70.236,2.504 70.236,2.23 69.413,2.23 69.413,2.367 69.276,2.367 69.276,3.19 69.413,3.19 69.413,3.053 69.55,3.053 69.55,2.504 70.099,2.504
  region: 71.608,3.053 71.745,3.053 71.745,2.642 71.745,2.504 71.745,2.367 71.608,2.367 71.608,2.23 70.648,2.23 70.648,2.642 70.51,2.642 70.51,2.779 70.648,2.779 70.648,3.053 70.785,3.053 70.785,3.19 71.608,3.19 hole: 71.471,2.916 70.785,2.916 70.785,2.504 71.471,2.504 71.471,2.642 71.471,2.779
  region: 73.939,3.053 73.939,2.23 73.665,2.23 73.665,3.19 73.939,3.19
  region: 76.134,2.23 75.722,2.23 75.722,2.504 76.408,2.504 76.408,2.642 75.722,2.642 75.722,3.19 76.683,3.19 76.683,2.916 75.997,2.916 75.997,2.779 76.683,2.779 76.683,2.23 76.271,2.23
Bottom Layer:
  text "FTM-V_01-RMT" at 23.114,7.493 h1.52

## Text inside footprints (layer, text, board x,y; h text height)
P1: Top Overlay "A-" at 20.015,39.214 h1; Top Overlay "HX711 Module" at 26.289,44.323 h2.03; Top Overlay "GND" at 33.096,41.986 h1; Top Overlay "DT" at 33.731,39.446 h1; Top Overlay "SCK" at 33.223,36.906 h1; Top Overlay "VCC" at 33.223,34.366 h1; Top Overlay "B+" at 20.015,31.826 h1; Top Overlay "B-" at 20.015,34.493 h1; Top Overlay "A+" at 19.888,36.906 h1; Top Overlay "E-" at 20.015,41.986 h1; Top Overlay "E+" at 20.015,44.526 h1